# EAGLE board main (EAGLE 6.2)
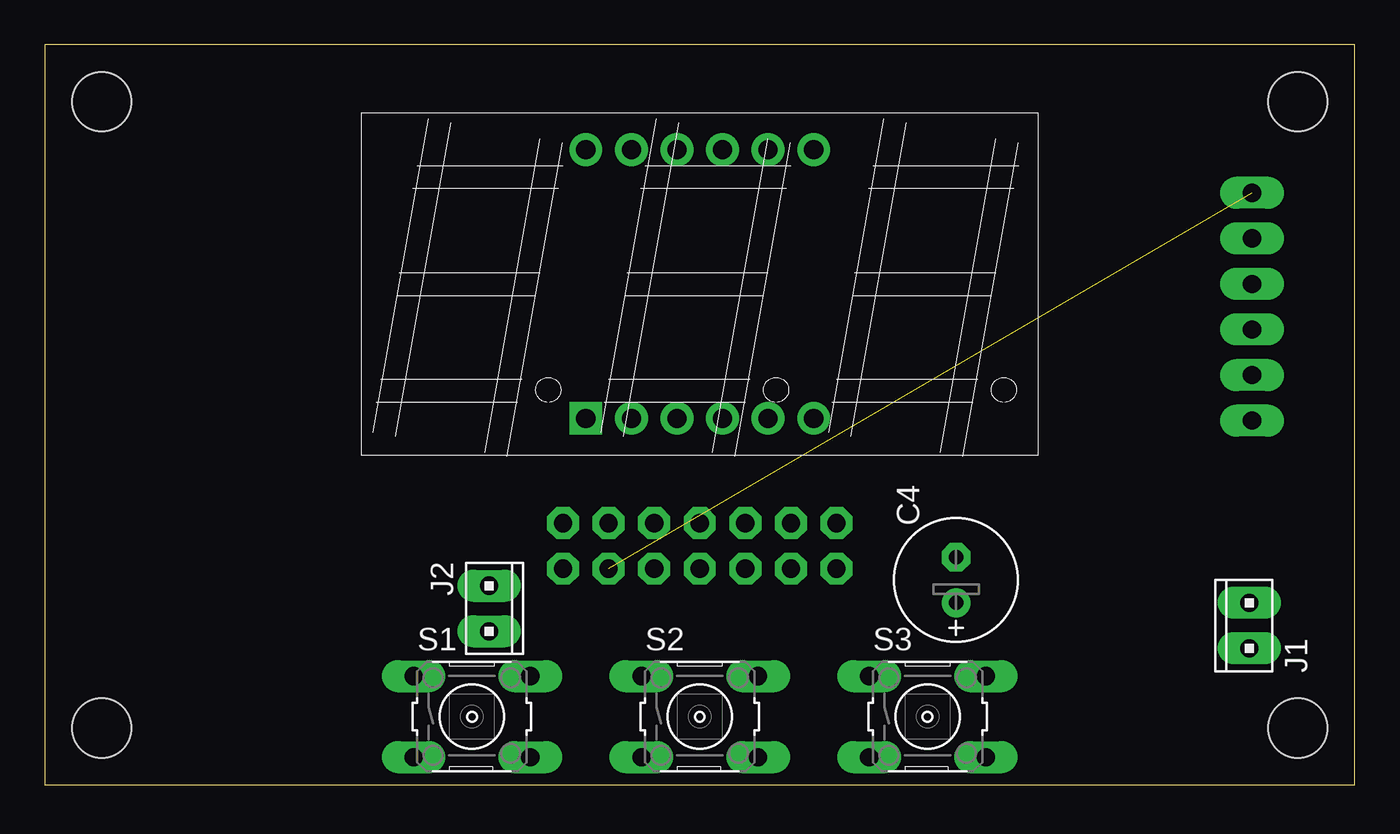
[diagram p0: board, top side]
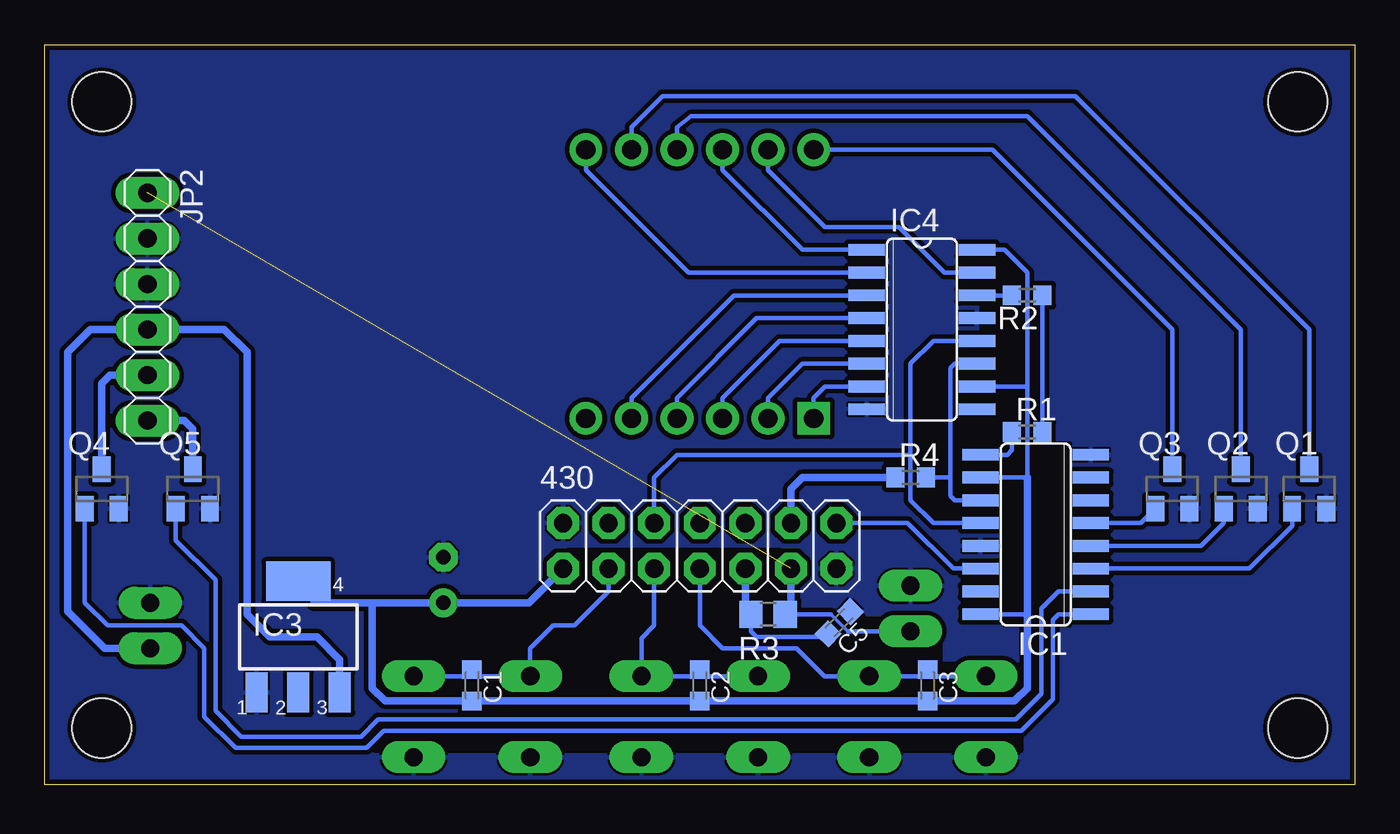
[diagram p1: board, bottom side, seen from below]

Size 73.03 x 41.27 mm. Coordinates in mm from the lower left corner, seen from the top.
Outline: 73.03,0 73.03,41.27 0,41.27 0,0 73.03,0
Copper layers (1*16): Top 0.035mm / dielectric 1.5mm / Bottom 0.035mm
Design rules "default *": minimum track width 10mil, minimum drill 42mil, track to track 10mil, track to pad 10mil, pad to pad 10mil, via to via 10mil, smd to smd 5mil, copper to edge 10mil, drill to drill 8mil, minimum pad ring 15mil, minimum via ring 8mil, stop-mask expansion 4mil, vias tented up to drill 0mil, thermal gap 5mil
Holes 3.3 mm at 69.85,3.17 69.85,38.1 3.17,38.1 3.17,3.17
bRestrict: area 20.6,4.8 to 54.6,13; area 18.4,22.4 to 20.8,28.4; area 15.9,8.9 to 19.5,19.1; area 18.6,1.9 to 54.6,2.5

## Footprints (pad centres in the part's own frame; a part is rotated, then mirrored left to right if it is on the bottom)
2X07 = drill 1.016 octagon: 1 -7.62,-1.27; 2 -7.62,1.27; 3 -5.08,-1.27; 4 -5.08,1.27; 5 -2.54,-1.27; 6 -2.54,1.27; 7 0,-1.27; 8 0,1.27; 9 2.54,-1.27; 10 2.54,1.27; 11 5.08,-1.27; 12 5.08,1.27; 13 7.62,-1.27; 14 7.62,1.27
C0603K = smd 1.05 x 1.08: 1 -0.875,0; 2 0.875,0
E2,5-7 = drill 0.813 pad 1.6: + -1.27,0 | drill 0.813 pad 1.6 octagon: - 1.27,0
SO16 = smd 0.66 x 2.032: 1 -4.445,-3.073; 2 -3.175,-3.073; 3 -1.905,-3.073; 4 -0.635,-3.073; 5 0.635,-3.073; 6 1.905,-3.073; 7 3.175,-3.073; 8 4.445,-3.073; 9 4.445,3.073; 10 3.175,3.073; 11 1.905,3.073; 12 0.635,3.073; 13 -0.635,3.073; 14 -1.905,3.073; 15 -3.175,3.073; 16 -4.445,3.073
SOT223 = smd 1.219 x 2.235: 1 -2.311,-3.099; 2 0,-3.099; 3 2.311,-3.099 | smd 3.6 x 2.2: 4 0,3.099
10X02MTA = drill 1.016 long: 1 1.27,0; 2 -1.27,0
1X06 = drill 1.016 long: 1 -6.35,0; 2 -3.81,0; 3 -1.27,0; 4 1.27,0; 5 3.81,0; 6 6.35,0
SOT23 = smd 1 x 1.4: 1 -0.95,-1.1; 2 0.95,-1.1; 3 0,1.1
R0603 = smd 1 x 1.1: 1 -0.85,0; 2 0.85,0
R0805 = smd 1.3 x 1.5: 1 -0.95,0; 2 0.95,0
B3F-10XX = drill 1.016 long: 1 -3.251,2.261; 2 3.251,2.261; 3 -3.251,-2.261; 4 3.251,-2.261
BL-T52X-31 = drill 1.067 square: P$1 -6.35,-7.493 | drill 1.067: P$2 -3.81,-7.493; P$3 -1.27,-7.493; P$4 1.27,-7.493; P$5 3.81,-7.493; P$6 6.35,-7.493; P$7 -6.35,7.493; P$8 -3.81,7.493; P$9 -1.27,7.493; P$10 1.27,7.493; P$11 3.81,7.493; P$12 6.35,7.493

## Placement (x,y rotation side)
430  [2X07]  36.51,13.34 0 bottom
C1  [C0603K]  49.21,5.56 270 bottom
C2  [C0603K]  36.51,5.56 270 bottom
C3  [C0603K]  23.81,5.56 270 bottom
C4  [E2,5-7]  50.8,11.43 90 top
C5  470nF  [C0603K]  28.73,9.05 225 bottom
IC1  74LS595D  [SO16]  17.78,13.97 90 bottom
IC3  317EMP  [SOT223]  58.9,8.26 0 bottom
IC4  74LS595D  [SO16]  24.13,25.4 270 bottom
J1  [10X02MTA]  67.15,8.89 90 top
J2  [10X02MTA]  24.77,9.84 270 top
JP2  [1X06]  67.31,26.67 270 bottom
Q1  BSS123  [SOT23]  2.54,16.51 0 bottom
Q2  BSS123  [SOT23]  6.35,16.51 0 bottom
Q3  BSS123  [SOT23]  10.16,16.51 0 bottom
Q4  BSS123  [SOT23]  69.85,16.51 0 bottom
Q5  BSS123  [SOT23]  64.77,16.51 0 bottom
R1  0  [R0603]  18.26,19.68 0 bottom
R2  0  [R0603]  18.26,27.3 180 bottom
R3  720ish  [R0805]  32.7,9.53 180 bottom
R4  0  [R0603]  24.77,17.14 0 bottom
S1  [B3F-10XX]  23.81,3.81 0 top
S2  [B3F-10XX]  36.51,3.81 0 top
S3  [B3F-10XX]  49.21,3.81 0 top
U$1  BL-T52C-31  [BL-T52X-31]  36.51,27.94 0 top

## Library data of the parts
430 JP2 = pinhead
C1-C5 R1-R4 = rcl
IC1 IC4 = 74xx-us
IC3 = linear
J1 J2 = con-amp
Q1-Q5 = transistor-small-signal
S1-S3 = switch-omron; MPN: B3F-1000; OC_FARNELL: 176432; OC_NEWARK: 36M3542
U$1 = mjg

## Nets
+5V: IC3.3 J1.2 JP2.4
GND: 430.2 430.13 C4.- C5.1 IC1.8 IC1.13 IC3.1 IC4.8 IC4.13 J1.1 J2.2 JP2.2 JP2.3 Q1.2 Q2.2 Q3.2 Q4.2 Q5.2 S1.3 S1.4 S2.3 S2.4 S3.3 S3.4
N$1: IC4.15 U$1.P$8
N$2: IC4.1 U$1.P$9
N$3: IC4.7 U$1.P$1
N$4: IC4.6 U$1.P$2
N$5: IC4.5 U$1.P$3
N$6: IC4.4 U$1.P$4
N$7: IC4.3 U$1.P$5
N$8: IC4.2 U$1.P$12
N$9: Q1.3 U$1.P$11
N$10: Q2.3 U$1.P$10
N$11: Q3.3 U$1.P$7
N$12: IC1.3 Q1.1
N$13: 430.14 IC1.14
N$14: IC4.14 R2.2
N$15: 430.7 C3.1 S1.1 S1.2
N$16: IC1.9 R1.1
N$17: 430.11 J2.1 JP2.1 R3.1
N$18: 430.3 C1.1 S3.1 S3.2
N$19: R1.2 R2.1
N$20: IC1.1 Q4.1
N$21: IC1.11 IC4.11 R4.2
N$22: IC1.4 Q2.1
N$23: JP2.5 Q4.3
N$24: IC1.5 Q3.1
N$25: IC1.2 Q5.1
N$26: 430.12 R4.1
N$28: JP2.6 Q5.3
N$29: 430.5 C2.1 S2.1 S2.2
N$30: 430.6 IC1.12 IC4.12
N$31: 430.9 C5.2 R3.2
VCC: 430.1 C1.2 C2.2 C3.2 C4.+ IC1.10 IC1.16 IC3.4 IC4.10 IC4.16

## Tracks (layer width: path | path; a pad name or v marks a point on that pad's centre or on a via)
+5V
  Bottom 0.406: J1.2 69.69,7.62 71.75,9.68 71.75,24.13 70.48,25.4 JP2.4 63.02,25.4 61.75,24.13 61.75,9.53 60.48,8.26 57.85,8.26 56.59,6.99 IC3.3
GND
  pour Bottom: 0,41.27 73.03,41.27 73.03,0 0,0
N$1
  Bottom 0.254: IC4.15 22.86,28.57 25.4,31.11 29.53,31.11 32.7,34.29 U$1.P$8
N$2
  Bottom 0.254: U$1.P$9 35.24,34.29 30.8,29.84 IC4.1
N$3
  Bottom 0.254: U$1.P$1 30.16,21.59 29.53,22.23 IC4.7
N$4
  Bottom 0.254: U$1.P$2 32.7,21.59 30.8,23.5 IC4.6
N$5
  Bottom 0.254: U$1.P$3 35.24,21.59 32.07,24.77 IC4.5
N$6
  Bottom 0.254: U$1.P$4 37.78,21.59 33.34,26.04 IC4.4
N$7
  Bottom 0.254: U$1.P$5 40.32,21.59 34.61,27.3 IC4.3
N$8
  Bottom 0.254: U$1.P$12 42.86,34.29 37.15,28.57 IC4.2
N$9
  Bottom 0.254: Q1.3 2.54,25.4 15.56,38.42 38.58,38.42 40.32,36.67 U$1.P$11
N$10
  Bottom 0.254: Q2.3 6.35,25.4 18.26,37.31 36.99,37.31 37.78,36.67 U$1.P$10
N$11
  Bottom 0.254: Q3.3 10.16,25.4 20.19,35.43 U$1.P$7
N$12
  Bottom 0.254: Q1.1 3.49,14.45 5.87,12.06 IC1.3
N$13
  Bottom 0.254: 430.14 24.92,14.61 22.38,12.06 IC1.14
N$14
  Bottom 0.254: R2.2 IC4.14
N$15
  Bottom 0.254: S1.1 23.77,6.07 C3.1 23.86,6.07 S1.2 29.57,6.07 31.11,7.62 35.24,7.62 36.51,8.89 430.7
N$16
  Bottom 0.254: IC1.9 19.36,18.41 19.11,18.67 R1.1
N$17  (1 unrouted)
  Bottom 0.203: 29.21,9.53 28.26,8.57
  Bottom 0.254: R3.1 29.21,9.53 | 28.26,8.57 J2.1
  Bottom 0.406: 430.11 31.43,10.16 R3.1
N$18
  Bottom 0.254: S3.2 49.26,6.07 C1.1 49.17,6.07 S3.1 45.96,7.62 44.69,8.89 43.5,8.89 41.59,10.79 430.3
N$19
  Bottom 0.254: R2.1 R1.2
N$20
  Bottom 0.254: IC1.1 16.51,9.53 16.83,9.21 16.83,4.76 18.57,3.02 54.13,3.02 55.09,2.06 62.39,2.06 64.14,3.81 64.14,7.62 65.41,8.89 69.53,8.89 70.8,10.16 Q4.1
N$21
  Bottom 0.254: IC4.11 22.29,23.5 22.54,23.24 22.54,17.14 | 22.54,17.14 22.54,16.13 22.29,15.88 IC1.11 | R4.2 22.54,17.14
N$22
  Bottom 0.254: Q2.1 7.3,14.61 8.57,13.34 IC1.4
N$23
  Bottom 0.406: Q4.3 69.85,22.38 69.37,22.86 JP2.5
N$24
  Bottom 0.254: Q3.1 11.91,14.61 IC1.5
N$25
  Bottom 0.254: IC1.2 16.51,10.79 17.46,9.84 17.46,5.08 18.89,3.65 54.45,3.65 55.4,2.7 62.07,2.7 63.5,4.13 63.5,11.43 65.72,13.65 Q5.1
N$26
  Bottom 0.406: R4.1 30.8,17.14 31.43,16.51 430.12
N$27
  pour Bottom: 44.45,34.29 44.45,39.37 67.94,39.37 67.94,34.29
N$28
  Bottom 0.406: Q5.3 64.77,19.84 65.25,20.32 JP2.6
N$29
  Bottom 0.254: S2.1 36.47,6.07 C2.1 36.56,6.07 S2.2 39.76,8.18 39.05,8.89 430.5
N$30
  Bottom 0.254: IC1.12 23.5,14.61 24.77,15.88 24.77,18.41 | 24.77,18.41 24.77,23.5 23.5,24.77 IC4.12 | 430.6 39.05,17.14 37.78,18.41 24.77,18.41
N$31
  Bottom 0.254: R3.2 33.65,8.57 33.34,8.26 29.53,8.26 C5.2
  Bottom 0.406: 430.9 33.97,9.85 R3.2
VCC
  Bottom 0.254: 58.02,10.16 IC3.4 | 18.26,9.53 IC1.16 | IC4.16 19.53,29.84 18.26,28.57 18.26,22.23 | 18.26,22.23 18.26,17.14 IC1.10 | 54.77,10 54.93,10.16 | IC4.10 18.26,22.23
  Bottom 0.406: 430.1 46.04,10.16 C4.+ 54.93,10.16 58.02,10.16 | 18.26,17.14 18.26,9.53 18.26,5.4 18.97,4.68 C3.2 C2.2 C1.2 54.05,4.68 54.77,5.4 54.77,10

## Text on the board
bRestrict: FUSERATOR V6 | 2012 Matthew Gardeski